# EAGLE board marqee_attiny85_new (EAGLE 8.6.0)
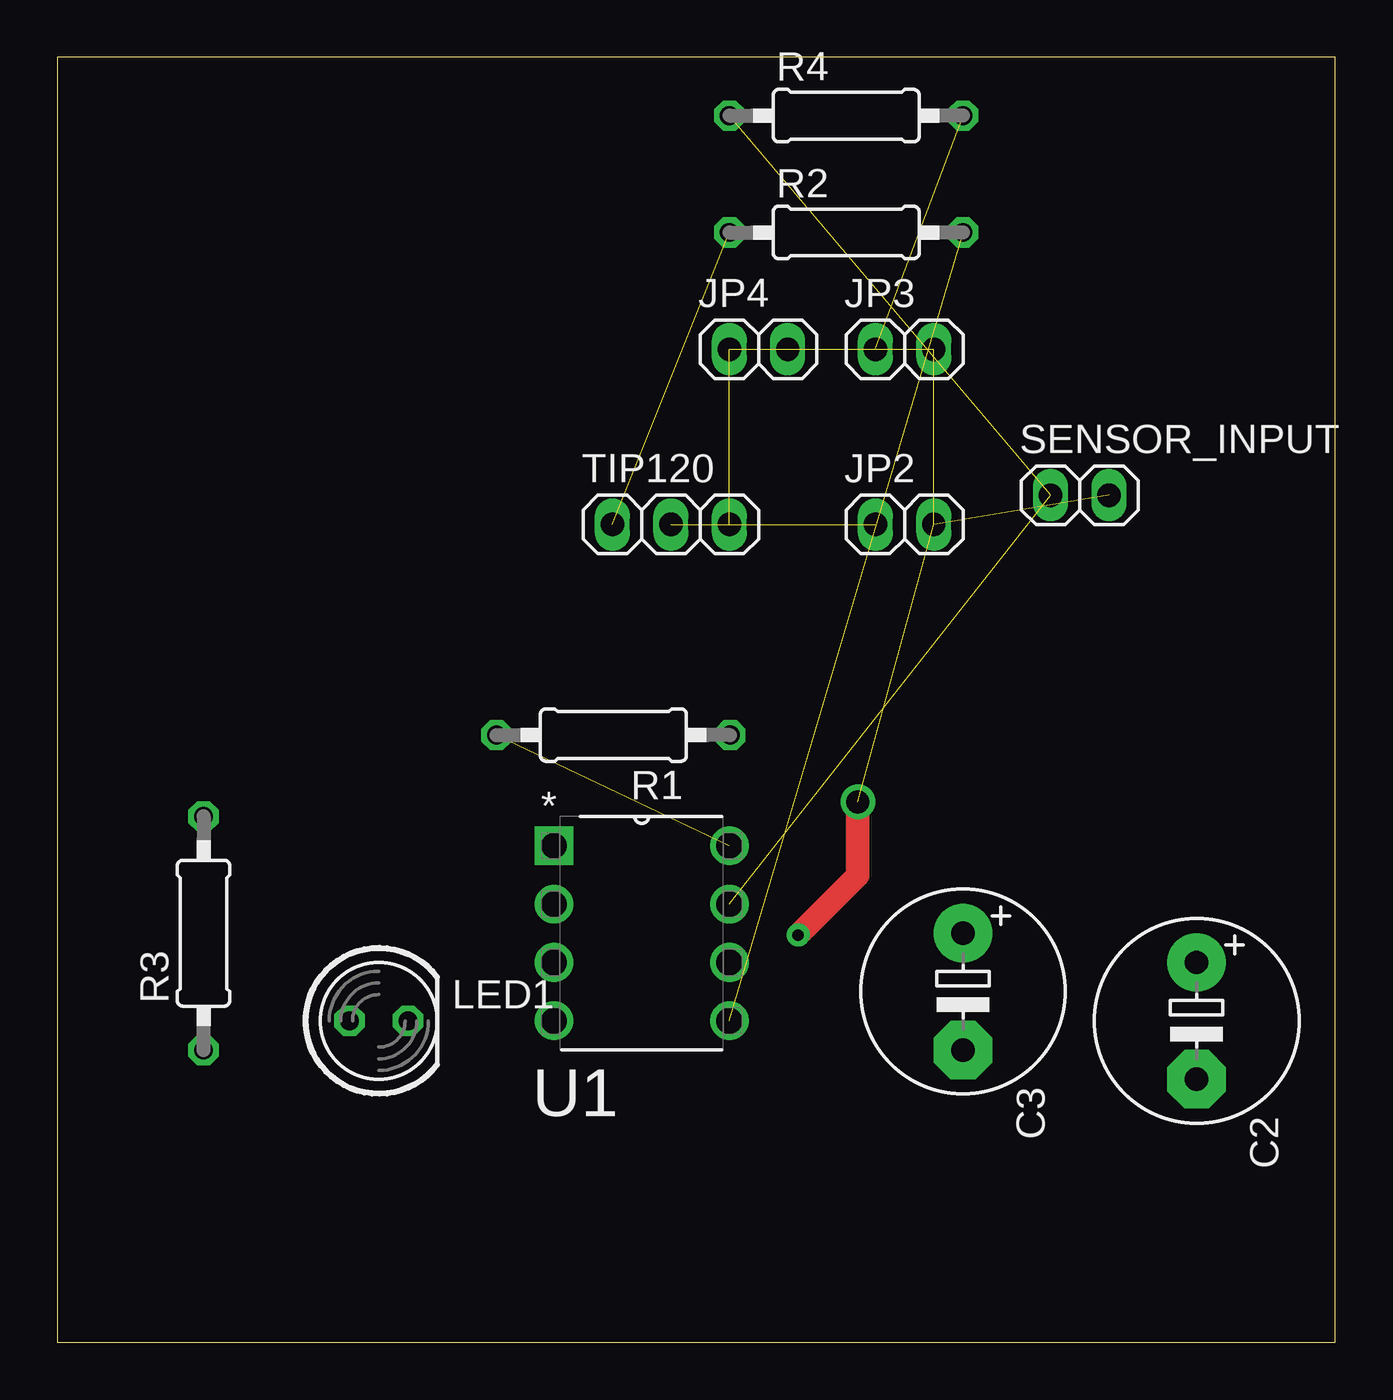
[diagram p0: board, top side]
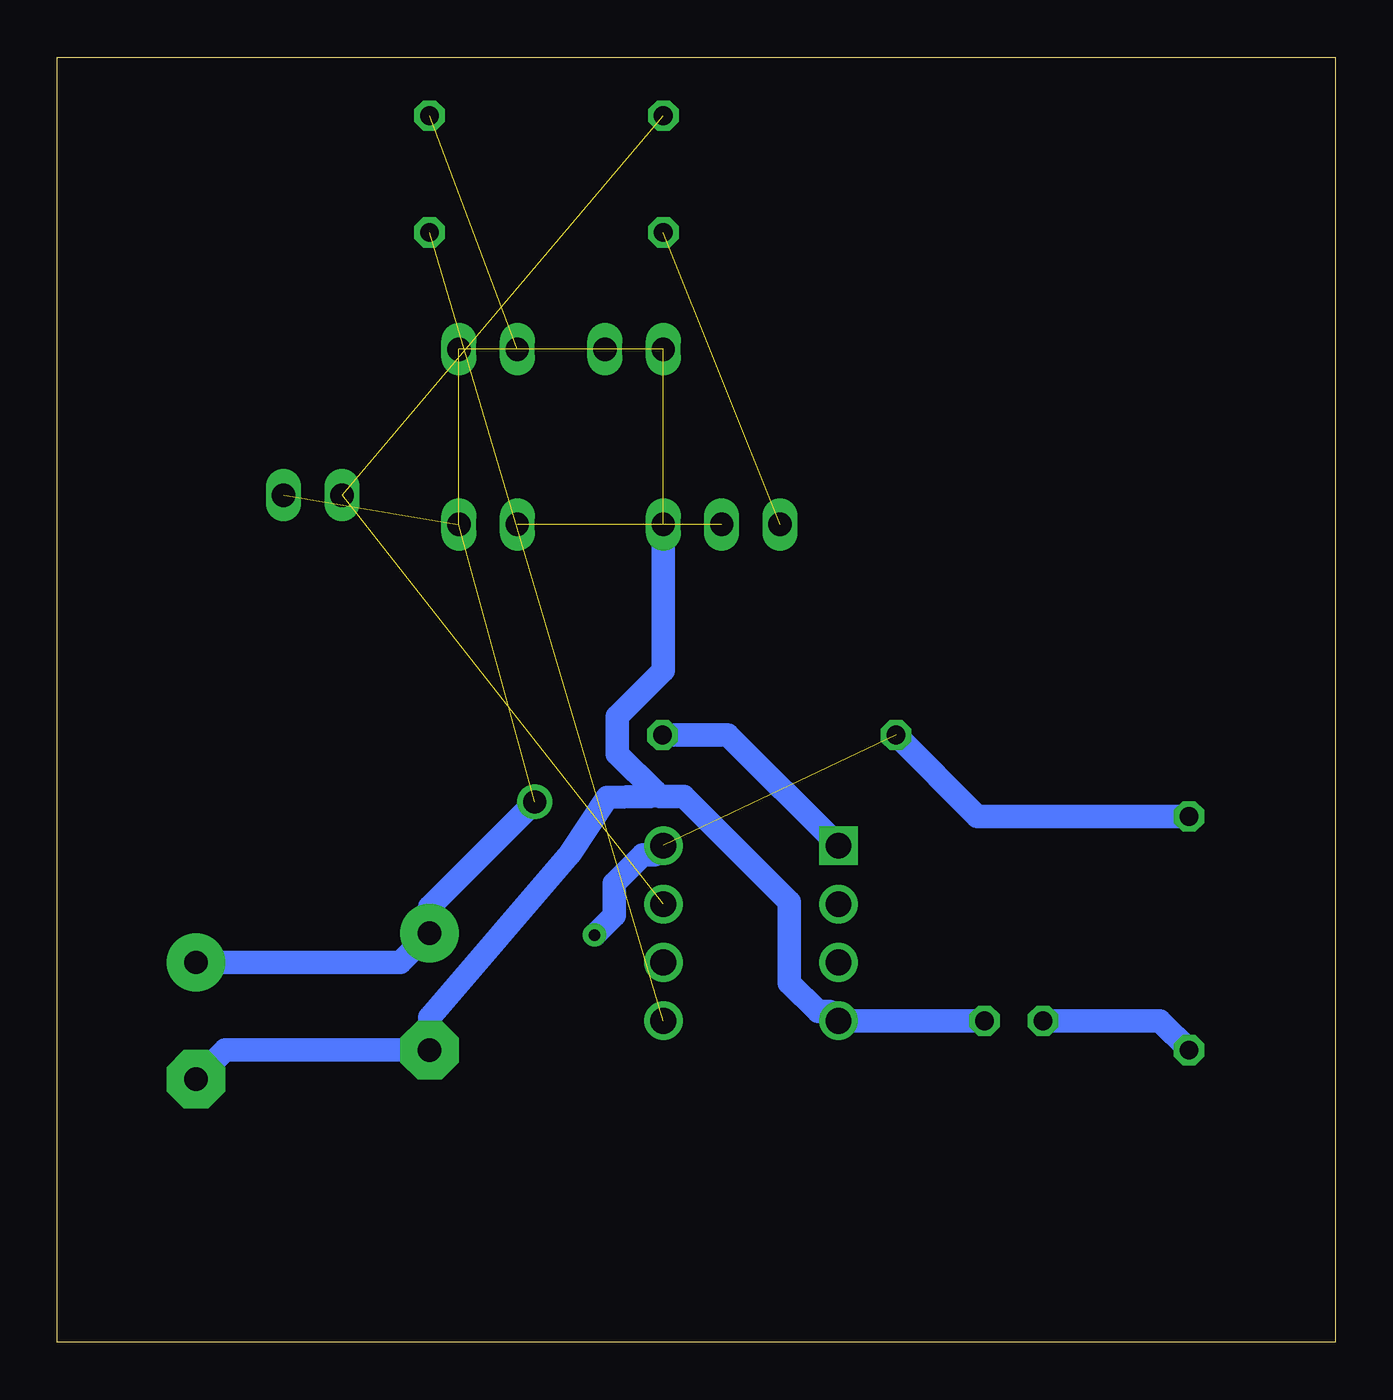
[diagram p1: board, bottom side, seen from below]

Size 55.55 x 55.87 mm. Coordinates in mm from the lower left corner, seen from the top.
Outline: 0,0 55.55,0 55.55,55.87 0,55.87 0,0
Copper layers (1*16): Top 0.035mm / dielectric 1.5mm / Bottom 0.035mm
Design rules "OthermillDRC_1_32_v2": minimum track width 8mil, minimum drill 0.8mm, track to track 0.794003125mm, track to pad 0.794003125mm, pad to pad 0.794003125mm, via to via 0.794003125mm, smd to smd 0mil, copper to edge 0mil, drill to drill 1mil, minimum pad ring 10mil, minimum via ring 10mil, stop-mask expansion 1mil, vias tented up to drill 30mil, thermal gap 10mil

## Footprints (pad centres in the part's own frame; a part is rotated, then mirrored left to right if it is on the bottom)
E5-8,5 = drill 1.016 pad 2.54: + -2.54,0 | drill 1.016 pad 2.54 octagon: - 2.54,0
1X02 = drill 1.016 long: 1 -1.27,0; 2 1.27,0
LED5MM = drill 0.813 octagon: A -1.27,0; K 1.27,0
0207/10 = drill 0.813 octagon: 1 -5.08,0; 2 5.08,0
1X03 = drill 1.016 long: 1 -2.54,0; 2 0,0; 3 2.54,0
DIP254P762X533-8 = drill 1.118 square: 1 -7.62,7.62 | drill 1.118: 2 -7.62,5.08; 3 -7.62,2.54; 4 -7.62,0; 5 0,0; 6 0,2.54; 7 0,5.08; 8 0,7.62

## Placement (x,y rotation side)
C2  47uF  [E5-8,5]  49.53,13.97 270 top
C3  47uF  [E5-8,5]  39.37,15.24 270 top
JP2  [1X02]  36.83,35.56 0 top
JP3  [1X02]  36.83,43.18 0 top
JP4  [1X02]  30.48,43.18 0 top
LED1  [LED5MM]  13.97,13.97 0 top
R1  10k  [0207/10]  24.17,26.4 180 top
R2  1k  [0207/10]  34.29,48.26 0 top
R3  220  [0207/10]  6.35,17.78 90 top
R4  1k  [0207/10]  34.29,53.34 0 top
SENSOR_INPUT  [1X02]  44.45,36.83 0 top
TIP120  [1X03]  26.67,35.56 0 top
U1  ATTINY85-20PU  [DIP254P762X533-8]  29.21,13.97 0 top

## Library data of the parts
C2 C3 = rcl; SPICEPREFIX: C
JP2-JP4 SENSOR_INPUT TIP120 = pinhead
LED1 = led
R1-R4 = resistor
U1 = Atmel_By_element14_Batch_1; MPN: ATTINY85-20PU; OC_FARNELL: 1455162; OC_NEWARK: 58M3796; PACKAGE: PDIP-8; SUPPLIER: Atmel

## Nets
ANALOG_SENSOR_IN: R4.1 SENSOR_INPUT.1 U1.7
GND: C2.- C3.- JP3.1 JP4.1 LED1.K R4.2 TIP120.3 U1.4
N$1: R1.1 U1.1
N$2: R2.1 TIP120.1
N$3: LED1.A R3.1
N$4: R2.2 U1.5
THING: JP2.1 TIP120.2
VCC: C2.+ C3.+ JP2.2 JP3.2 JP4.2 R1.2 R3.2 SENSOR_INPUT.2 U1.8

## Tracks (layer width: path | path; a pad name or v marks a point on that pad's centre or on a via)
ANALOG_SENSOR_IN  (2 unrouted)
GND  (3 unrouted)
  Bottom 1.016: LED1.K U1.4 21.99,14.37 22.48,14.37 23.73,15.62 23.73,19.14 28.32,23.73 29.36,23.73 29.56,23.94 | TIP120.3 29.21,29.21 31.21,27.21 31.21,25.59 29.56,23.94 | 29.56,23.94 29.77,23.73 30.1,23.73 31.65,23.68 33.25,21.25 39.37,14.13 C3.- 48.26,12.7 C2.-
N$1
  Bottom 1.016: U1.1 26.4,26.4 R1.1
N$2  (1 unrouted)
N$3
  Bottom 1.016: R3.1 7.62,13.97 LED1.A
N$4  (1 unrouted)
THING  (1 unrouted)
VCC  (via drill 0.5, 1)  (5 unrouted)
  Top 1.016: v34.8,23.5 34.8,20.3 v32.2,17.7
  Bottom 1.016: R3.2 15.55,22.86 R1.2 | C2.+ 40.64,16.51 C3.+ 39.37,18.93 v34.8,23.5 | v32.2,17.7 31.35,18.55 31.35,19.94 30.1,21.19 29.61,21.19 U1.8